# EAGLE board answer (EAGLE 7.4.0)

Size 40 x 25 mm. Coordinates in mm from the lower left corner, seen from the top.
Outline: 0,0 40,0 40,25 0,25 0,0
Copper layers used: 
Holes 3.2 mm at 4,4 36,4 36,21 4,21
layer 41: area 17,10 to 23,15

## Footprints (pad centres in the part's own frame; a part is rotated, then mirrored left to right if it is on the bottom)
R0805 = smd 1 x 1.3: 1 -1,0; 2 1,0

## Placement (x,y rotation side)
R1  10k  [R0805]  15,12.5 0 top
R2  10k  [R0805]  25,12.5 0 top

## Library data of the parts
R1 R2 = synth

## Text on the board
tPlace: REV-A